# Altium PCB TempGun.PcbDoc
Units mm, origin at the board's own origin, x right, y up, seen from the top; angles counter-clockwise.
Board outline 71 x 30 mm, 3 copper layers (Top Layer, Mid-Layer 6, Bottom Layer); 43 components, 32 nets, 124 pads, 19 vias.
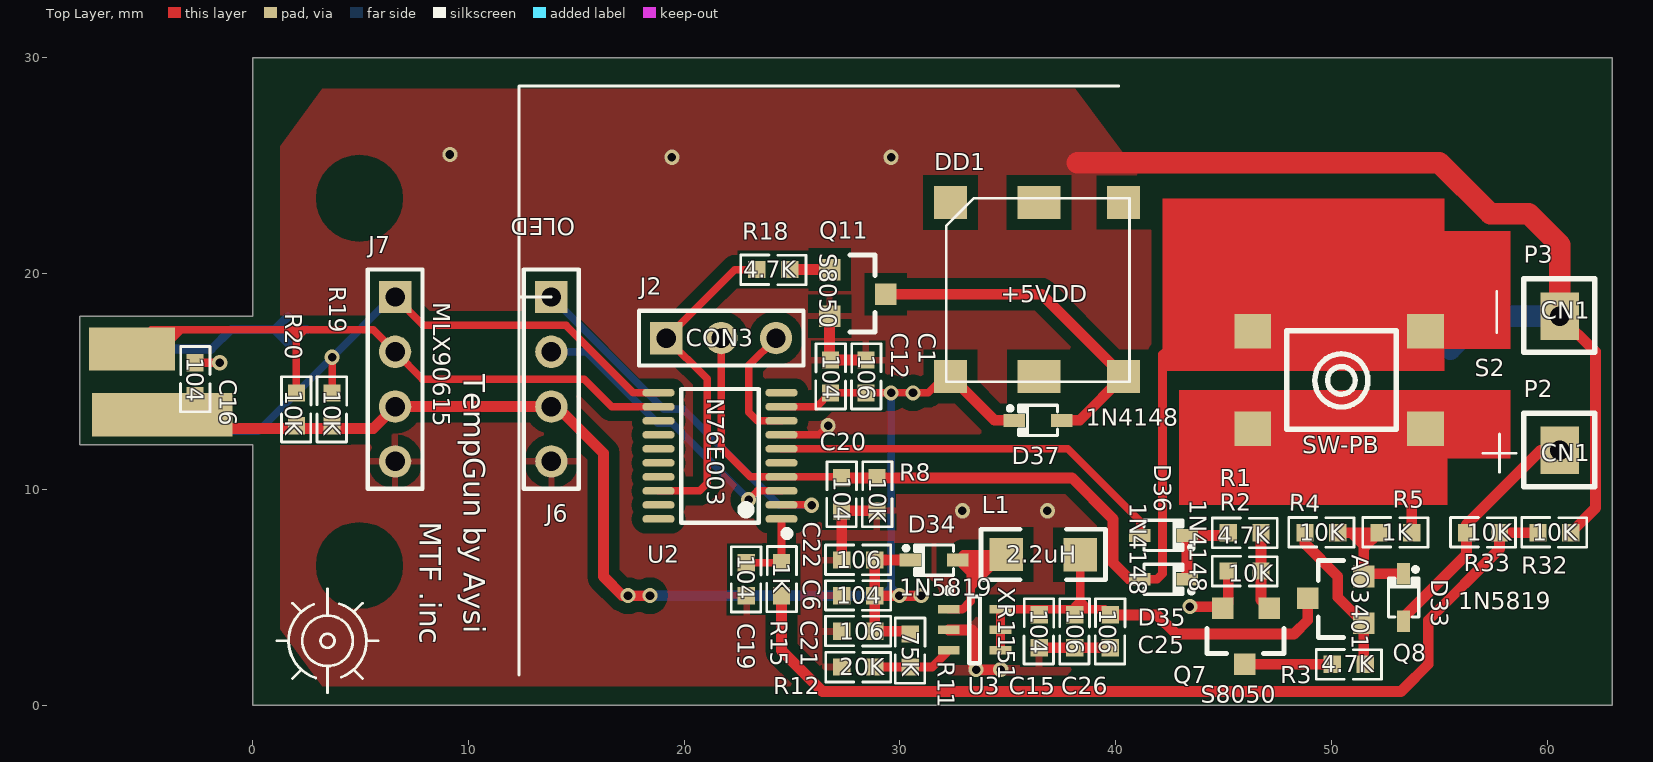
[diagram p0: Top Layer view]
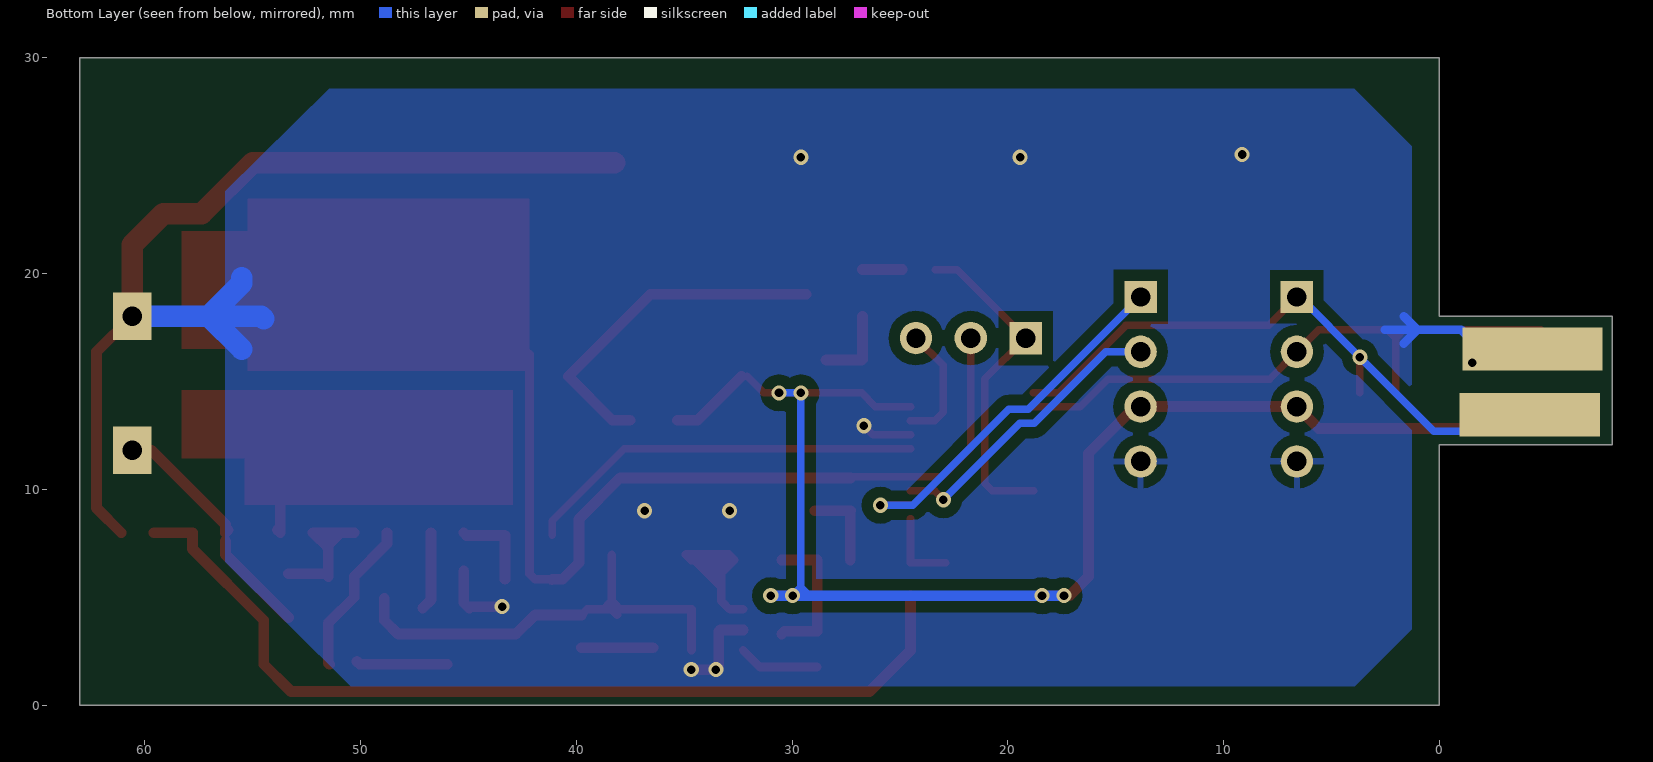
[diagram p1: Bottom Layer view, seen from below]

## Layer stack, top to bottom
Top Layer: signal copper 0.0356
Dielectric: dielectric 0.32, FR-4, Dk 4.8
Mid-Layer 6: signal copper 0.0356
Dielectric: dielectric 0.32, FR-4, Dk 4.8
Bottom Layer: signal copper 0.0356

## Board outline
-8.001,12.065 -8.001,18.034 0,18.034 0,30 63,30 63,0 0,0 0,12.065

## Design rules (kind name [scope] priority, off if disabled: settings)
Clearance Clearance_1 [IsRegion] p1: gap=0.5
Clearance [All] p2: gap=0.3
PolygonConnect PolygonConnect_1 [IsVia] p1: connectstyle=Direct reliefconductorwidth=0.254 reliefentries=4 polygonreliefangle="90 Angle"
PolygonConnect [All] p2: connectstyle=Relief reliefconductorwidth=0.3 reliefentries=4 polygonreliefangle="90 Angle"
RoutingVias [All] p1: holewidth=0.4 width=0.7 viastyle="Through Hole" minholewidth=0.4 minwidth=0.7 maxholewidth=0.711 maxwidth=1.27
SilkToSilkClearance [All] p1: silktosilkclearance=0
SilkscreenOverComponentPads [IsPad] p1: minsilkscreentomaskgap=0
SolderMaskExpansion [All] p1: expansion=0.102
TestPointUsage [All] p1: valid=0 allowmultiple=FALSE
Testpoint [All] p1: side=3 testpointundercomponent=TRUE minsize=1.016 maxsize=2.54 preferedsize=1.524 minholesize=0 maxholesize=1.016 preferedholesize=0.813 testpointgrid=0.025 style=297 order=0-112345678
Width [All] p1: maxlimit=2 minlimit=0.254 preferedwidth=0.3
22 further rules are at their usual default settings.

## Components (designator, comment, footprint, x,y, rotation, side; value= is the part's Value field where it differs from the comment)
C1 "106" 0603 28.429,14.477 r90 top
C6 "104" 0603 28.829,5.08 r180 top
C12 "104" 0603 26.778,14.477 r90 top
C15 "104" 0603 36.449,4.191 r270 top
C16 "104" 0603 -2.667,14.351 r90 top
C19 "104" 0603 22.879,6.603 r270 top
C20 "104" 0603 27.286,9.016 r90 top
C21 "106" 0603 28.829,3.429 r180 top
C22 "106" 0603 28.829,6.731 r180 top
C25 "106" 0603 39.751,4.191 r270 top
C26 "106" 0603 38.1,4.191 r270 top
D33 "1N5819" SOT-323 53.34,6.096 r270 top
D34 "1N5819" SOT-323 30.48,6.731 r0 top
D35 "1N4148" SOT-323 43.307,5.842 r180 top
D36 "1N4148" SOT-323 43.307,7.874 r180 top
D37 "1N4148" SOT-323 35.306,13.208 r0 top
DD1 "+5VDD" 8530 40.64,23.495 r270 top
J2 "CON3" HDR1X3 19.177,17.018 r0 top
J6 "OLED" HDR1X4 13.843,18.923 r270 top locked
J7 "MLX90615" HDR1X4 6.604,18.923 r270 top
L1 "2.2uH" 1206 38.354,6.985 r180 top
P2 "CN1" 1PIN 60.579,11.811 r0 top
P3 "CN1" 1PIN 60.579,18.034 r0 top
Q7 "S8050" SOT-23-3 45.974,1.905 r90 top
Q8 "AO3401" SOT-23-3 48.895,4.953 r0 top
Q11 "S8050" SOT-23-3 29.337,19.05 r180 top
R1 "4.7K" 0603 45.212,8.001 r0 top
R2 "10K" 0603 45.212,6.223 r0 top
R3 "4.7K" 0603 50.038,1.905 r0 top
R4 "10K" 0603 50.292,8.001 r180 top
R5 "1K" 0603 53.721,8.001 r180 top
R8 "10K" 0603 28.937,9.016 r90 top
R11 "75K" 0603 30.48,3.302 r270 top
R12 "20K" 0603 27.305,1.778 r0 top
R15 "1K" 0603 24.511,5.08 r90 top
R18 "4.7K" 0603 23.368,20.193 r0 top
R19 "10K" 0603 3.683,14.478 r270 top
R20 "10K" 0603 2.032,14.478 r270 top
R32 "10K" 0603 61.087,8.001 r180 top
R33 "10K" 0603 57.785,8.001 r180 top
S2 "SW-PB" SW-4-SMD 54.356,12.827 r90 top
U2 "N76E003" TSSOP-20 24.511,8.636 r90 top
U3 "XR1151" SOT-23-6 32.258,4.445 r0 top

## Footprints (in the part's own frame and the unit in brackets; to place one, negate y for a bottom-side part, rotate by r counter-clockwise, add the part's x,y. Pads: shape width x height; smd on the part's side, far side on the other; paste and mask are expansions set on the pad)
1PIN [mm]
  rect 1.8x2.2 hole 0.9: 1(0,0)
  silkscreen extent -1.68,-1.68 1.63,1.72
0603 [mm]
  rect 0.8x0.8 smd: 1(0,0) 2(1.524,0)
  silkscreen extent -0.74,-0.7 2.27,0.68, body extent 0,-0.4 1.53,0.4, height 1
1206 [mm]
  rect 1.55x1.55 smd: 1(0,0) 2(3.43,-0.004)
  silkscreen extent -1.17,-1.17 4.6,1.17, body extent 0,-0.87 3.45,0.87, height 2
8530 [mm]
  rect 1.524x1.524 smd: 0(0.2,-0.275) 0(0.2,-8.3) 1(8.25,-8.3) 2(8.25,-0.275)
  rect 1.524x2 smd: 0(0.2,-4.2) 0(8.25,-4.2)
  silkscreen extent 0,-8.5 8.5,0
HDR1X3 [mm] "Connector; Header; 3 Position"
  rect 1.5x1.5 hole 0.9: 1(0,0)
  round 1.5 hole 0.9: 2(2.54,0) 3(5.08,0)
  silkscreen extent -1.27,-1.27 6.35,1.27
HDR1X4 [mm] "Connector; Header; 4 Position"
  rect 1.5x1.5 hole 0.9: 1(0,0)
  round 1.5 hole 0.9: 2(2.54,0) 3(5.08,0) 4(7.62,0)
  silkscreen extent -1.27,-1.27 8.89,1.27
SOT-23-3 [mm]
  rect 1x1 smd: 1(0,0) 2(2.598,-1.143) 3(2.598,1.016)
  silkscreen extent 0.49,-1.82 1.66,1.75, body extent 0.48,-1.8 2.07,1.75, height 1
SOT-23-6 [mm]
  rect 1x0.4 smd: 1(0,0) 2(0,-0.95) 3(0,-1.9) 4(2.4,-1.9) 5(2.4,-0.95) 6(2.4,0)
  silkscreen extent -0.12,-2.5 1.45,1
SOT-323 [mm]
  rect 1x0.6 smd: 1(2.2,0) 2(0,0)
  silkscreen extent -0.3,-0.7 2,0.7
SW-4-SMD [mm]
  rect 1.6x1.7 smd: 1(0,8) 1(0,0) 2(4.5,8) 2(4.5,0)
  silkscreen extent -0.04,1.35 4.53,6.43
TSSOP-20 [mm]
  oval 0.35x1.5 smd: 1(0,0) 2(0.65,0) 3(1.3,0) 4(1.95,0) 5(2.6,0) 6(3.25,0) 7(3.9,0) 8(4.55,0) 9(5.2,0) 10(5.85,0) 11(5.85,5.7) 12(5.2,5.7) 13(4.55,5.7) 14(3.9,5.7) 15(3.25,5.7) 16(2.6,5.7) 17(1.95,5.7) 18(1.3,5.7) 19(0.65,5.7) 20(0,5.7)
  silkscreen extent -0.82,-0.4 6.02,4.65, body extent -0.38,0.55 6.22,5.15, height 1

## Part data
C1 C12: library part CAP
C6: library part CAP, "Capacitor"
C15 C16 C19 C20 C21 C22 C25 C26: library part CAP_W
D33 D34 D35 D36 D37: library part Diode, "Default Diode"
DD1: library part Pro58.tmp_UnNamed_18
J2: library part "Header 3", "Header, 3-Pin"
J6 J7: library part "Header 4", "Header, 4-Pin"
L1: library part INDUCTOR1_W
Q7 Q11: library part NPN, "NPN Bipolar Transistor"
Q8: library part MOSFET-P, "P-Channel MOSFET"
R1 R2 R3 R4 R5 R8 R11 R12 R15 R18 R19 R20 R32 R33: library part Res2, "Resistor"
S2: "Switch"

## Free pads (board coordinates)
  rect 6.5x2 smd: 0(-4.191,13.462)
  rect 4x2 smd: 1(-5.588,16.51)
  rect 6.5x2 smd far side: 2(-4.318,16.51) 3(-4.191,13.462)

## Via types
v1: diameter 0.7, hole 0.4, Top Layer to Bottom Layer, tented both sides, 19 vias

## Nets (pads, with @x,y where several pads share a name; then routed paths per layer and width w, separated by ;. In a path a pad name is that pad's centre, name@x,y a point inside that pad or via, vN(x,y) a via of type N, cw(c..) or ccw(c..) an arc to the next point about the centre after c; other vN are vias at no path point)
+3.3V: C1.1 C6.1 C12.1 C16.1 C21.1 C22.1 D34.2 D37.2 DD1.1 J6.3 J7.3 pad.0 R11.1 R19.2 R20.2 U2.9 | length 74.9
  Top Layer w0.35: U2.9 26.137,13.836 C12.1 C1.1 v1(29.591,14.478) v1(30.607,14.478) 31.319,14.478 DD1.1@32.086,15.245
  Top Layer w0.5: pad.0@-1.016,12.827 1.143,12.827 5.588,12.827 J7.3 J6.3 14.097,13.843 16.256,11.684 16.256,5.969 17.145,5.08 v1(18.415,5.08) v1(17.399,5.08) ; C6.1 v1(29.972,5.08) v1(30.988,5.08) ; R11.1 30.353,3.429 C21.1 C22.1 D34.2 ; DD1.1 34.377,13.208 D37.2
  Bottom Layer w0.35: 29.21,5.08 29.591,5.461 ; 29.591,5.08 29.591,5.588 ; v1(29.972,5.08) 29.591,5.461 ; v1(30.607,14.478) v1(29.591,14.478) 29.591,5.588 ; 29.591,5.461 29.591,5.588
  Bottom Layer w0.5: v1(18.415,5.08) v1(17.399,5.08) 27.432,5.08 v1(29.972,5.08) v1(30.988,5.08)
A: U2.20
B: U2.19
BAT+: D33.1 P2.1 R33.2 | length 11.4
  Top Layer w0.5: D33.1@53.34,4.064 56.261,6.985 R33.2@56.261,7.62 ; R33.2@56.134,8.128 R33.2 56.261,8.382 59.69,11.811 P2.1@60.96,11.811
C: U2.17
D: U2.16
DIG1: J6.1 U2.2 | length 17.5
  Top Layer w0.35: U2.2 25.893,9.286 v1(25.908,9.271)
  Bottom Layer w0.35: J6.1 19.05,13.716 19.963,13.716 24.408,9.271 v1(25.908,9.271)
DIG2: J6.2 U2.3 | length 13.7
  Top Layer w0.35: v1(22.987,9.525) 23.398,9.936 U2.3
  Bottom Layer w0.35: J6.2 15.464,16.383 18.781,13.066 19.446,13.066 v1(22.987,9.525)
DIG3: U2.5
DIG4: J2.3 U2.8 | length 5.6
  Top Layer w0.35: J2.3 22.987,15.748 22.987,13.589 23.39,13.186 U2.8
E: U2.15
G: U2.13
GND: C1.2 C6.2 C12.2 C15.2 C16.2 C19.2 C20.1 C21.2 C22.2 C25.2 C26.2 J6.4 J7.4 P3.1 pad.2 Q7.3 Q11.3 R2.1 R8.1 R12.1 R32.1 U2.7 U3.2 | length 80.2
  Top Layer w0.35: U2.7 26.252,12.536 v1(26.67,12.954) ; C12.2@26.739,16.041 C12.2
  Top Layer w0.4: C16.2 v1(-1.524,15.875)
  Top Layer w0.5: C12.2@26.739,16.041 Q11.3 ; C12.2 C1.2 ; C22.2 27.305,8.998 C20.1 R8.1 ; U3.2 33.335,3.495 33.401,3.429 33.401,1.778 v1(33.528,1.651) v1(34.671,1.651) ; C15.2 C25.2 ; v1(43.434,4.572) 44.889,4.572 Q7.3 45.212,4.757 R2.1 ; P3.1 62.23,16.383 62.23,9.144 R32.1
  Top Layer w1: 38.227,25.146 54.991,25.146 57.366,22.771 59.144,22.771 59.182,22.733 60.579,21.336 P3.1
  Bottom Layer w0.4: pad.2@-4.445,16.51 -1.905,16.51 -1.016,17.399 1.016,17.399 ; 1.651,16.764 1.016,17.399 ; 1.651,18.034 1.016,17.399 ; 2.54,17.399 1.016,17.399
  Bottom Layer w1: 54.483,17.907 54.61,18.034 57.023,18.034 ; 55.499,16.51 57.023,18.034 ; 55.499,19.812 55.499,19.558 57.023,18.034 ; P3.1 57.023,18.034
  other v1: 32.893,9.017 36.83,9.017 19.431,25.4 29.591,25.4 9.144,25.527
H: U2.10
ICPCK: J2.1 R18.1 U2.18 | length 15.5
  Top Layer w0.35: U2.18 20.574,9.936 ; 20.656,9.936 20.574,9.936 ; R18.1 22.352,20.193 J2.1 21.067,15.128 21.067,10.287 20.716,9.936 20.574,9.936
NetC19_1: C19.1 R15.2 U2.1 | length 3.7
  Top Layer w0.35: C19.1 R15.2 U2.1
NetD33_2: D33.2 Q8.3 R4.1 R5.2 | length 7.8
  Top Layer w0.5: R4.1 51.562,8.001 ; 50.927,8.001 51.493,7.435 51.493,7.297 ; D33.2 51.62,6.096 Q8.3 51.493,7.297 ; 51.493,7.297 R5.2 51.562,8.001 ; 51.493,7.297 51.562,7.366 51.562,8.001
NetD34_1: D34.1 L1.2 U3.1 | length 12.9
  Top Layer w0.4: U3.1 32.893,4.445 33.274,4.826 33.274,5.461 ; 33.274,5.756 33.274,5.715 ; 33.655,6.137 33.274,6.137 ; D34.1 L1.2@34.666,6.731 ; D34.1 33.041,6.371 ; D34.1 32.938,6.989 L1.2 ; 33.041,6.371 33.274,6.137 ; 33.041,6.371 33.803,6.371 34.163,6.731 L1.2@34.666,6.731 ; 33.274,5.461 33.274,5.715 ; 33.274,5.461 34.802,6.989 L1.2 ; 33.274,5.715 33.274,6.137 ; L1.2@34.666,6.731 L1.2 ; L1.2@34.666,6.731 L1.2
NetD35_2: D35.2 D36.2 R1.1 | length 4
  Top Layer w0.5: D35.2 D36.2 45.085,7.874 R1.1
NetD37_1: D37.1 DD1.2 Q11.1 | length 16.3
  Top Layer w0.5: Q11.1 36.56,19.05 DD1.2 38.328,13.208 D37.1
NetQ7_1: Q7.1 R3.1 | length 4.2
  Top Layer w0.5: Q7.1 R3.1 R3.1@50.165,2.032
NetQ7_2: Q7.2 R1.2 R2.2 | length 3.7
  Top Layer w0.5: R1.2 R2.2 46.736,4.884 Q7.2
NetQ8_2: Q8.2 R3.2 R4.2 | length 7.2
  Top Layer w0.5: R4.2 48.768,7.493 50.292,5.969 50.292,5.011 Q8.2 51.493,1.963 R3.2@51.435,1.905
NetQ11_2: Q11.2 R18.2 | length 1.8
  Top Layer w0.5: R18.2 Q11.2
NetR5_1: R5.1 S2.1 | length 13.3
  Top Layer w0.5: S2.1@46.356,12.827 54.356,12.827 53.721,12.192 R5.1 R5.1@53.848,8.128
NetR11_2: R11.2 R12.2 U3.3 | length 3.7
  Top Layer w0.4: R12.2 31.491,1.778 U3.3
NetR15_1: R15.1 R32.2 R33.1 | length 43.1
  Top Layer w0.5: R15.1 24.511,2.54 26.416,0.635 53.213,0.635 53.34,0.762 54.483,1.905 54.483,3.937 57.785,7.239 R33.1 R32.2
P1.7: D36.1 U2.6 | length 18.7
  Top Layer w0.35: U2.6 37.771,11.886 41.107,8.55 D36.1
"POWER KEY": C20.2 D35.1 J2.2 R8.2 S2.2 U2.4 | length 52.2
  Top Layer w0.35: J2.2 21.717,11.938 23.069,10.586 U2.4 27.24,10.586 C20.2
  Top Layer w0.4: D35.1 41.91,5.842 42.164,6.096 42.164,16.256 43.235,17.327
  Top Layer w0.5: C20.2 R8.2 35.688,10.54 37.212,10.54 37.974,10.54 39.878,8.636 39.878,6.604 40.64,5.842 D35.1 D35.1@41.129,5.82 ; 43.235,17.327 S2.2@54.356,17.327
SCL: J7.2 pad.1 R20.1 U2.12 | length 33.4
  Top Layer w0.35: 1.397,17.399 1.651,17.399 2.032,17.018 ; R20.1 2.032,16.764 ; 2.032,17.399 2.032,17.018 ; 2.413,17.399 2.032,17.018 ; U2.12 16.644,13.836 15.367,15.113 7.874,15.113 J7.2 5.588,17.399 -3.302,17.399 ; -3.302,17.399 -4.699,17.399 pad.1 -4.191,16.51 -3.302,17.399 ; 2.032,16.764 2.032,17.018 ; 2.032,16.764 2.032,17.018
SDA: J7.1 pad.3 R19.1 U2.11 | length 29.8
  Top Layer w0.35: R19.1 v1(3.683,16.129) ; J7.1 7.919,17.608 14.523,17.608 17.645,14.486 U2.11
  Bottom Layer w0.35: pad.3 -1.905,13.462 -1.143,12.7 0.254,12.7 ; 0.127,12.7 0.254,12.7 ; J7.1@6.604,18.669 J7.1 6.477,18.923 v1(3.683,16.129) 0.254,12.7
VCC: C15.1 C25.1 C26.1 L1.1 Q8.1 U3.4 U3.5 U3.6 | length 22.3
  Top Layer w0.4: U3.4 U3.6 39.497,4.445 C25.1 ; L1.1 38.354,4.826 ; 38.989,4.445 38.735,4.445 38.354,4.826 ; 38.354,4.826 38.354,4.445 C26.1 38.1,4.572 38.354,4.826
  Top Layer w0.5: C25.1 41.91,4.191 42.799,3.302 48.26,3.302 48.895,3.937 Q8.1
pads on no net: DD1.0 U2.14

## Polygon pours and split planes (outlines as drawn)
GND on Top Layer "Bottom Layer-No Net" (solid, remove dead copper, pour order 1000): 1.27,25.908 3.229,28.575 38.128,28.575 41.656,23.815 41.656,6.652 37.385,0.889 3.22,0.889 1.27,3.52
GND on Bottom Layer "Bottom Layer-No Net" (solid, remove dead copper, pour order 1001): 1.27,25.908 3.937,28.575 51.457,28.575 56.261,23.815 56.261,6.652 50.446,0.889 3.925,0.889 1.27,3.52

## Other copper
Top Layer:
  rectangle net "POWER KEY": 42.164,15.494 55.245,23.495
  rectangle net "POWER KEY": 55.118,16.51 58.293,21.971
  rectangle net NetR5_1: 42.926,9.271 55.372,14.605
  rectangle net NetR5_1: 55.118,11.43 58.293,14.605
  pour cut-out: 4.953,4.477 cw(c4.953,6.477) 2.953,6.477 cw(c4.953,6.477) 4.953,8.477 cw(c4.953,6.477) 6.953,6.477 cw(c4.953,6.477)
  pour cut-out: 4.953,21.495 cw(c4.953,23.495) 2.953,23.495 cw(c4.953,23.495) 4.953,25.495 cw(c4.953,23.495) 6.953,23.495 cw(c4.953,23.495)

## Silkscreen, mask and mechanical layers (free items; w line width, h text height)
Top Overlay:
  circle w0.127: c3.471,2.989 r1.171
  circle w0.127: c3.471,2.989 r0.324
  lines w0.127: 1.122,2.989 1.63,2.989 ; 1.852,1.243 2.265,1.656 ; 1.852,4.735 2.265,4.323 ; 2.837,4.679 ccw(c3.471,2.989) 2.921,1.27 ; 3.471,0.576 3.471,1.818 ; 3.471,4.16 3.471,5.402 ; 4.021,4.708 cw(c3.471,2.989) 4.105,1.299 ; 4.678,1.656 5.09,1.243 ; 4.678,4.323 5.09,4.735 ; 5.313,2.989 5.821,2.989 ; 12.343,1.402 12.343,28.702 40.143,28.702 ; 12.343,18.923 13.843,18.923 ; 57.023,11.684 58.547,11.684 ; 57.658,17.272 57.658,19.177 ; 57.785,10.795 57.785,12.573
  text "TempGun by Aysi" at 9.779,15.346 h1 r270
  text "MTF .inc" at 7.747,8.509 h1 r270
Mechanical 1:
  circle w0.127: c5,6.5 r1.25
  circle w0.127: c58.005,26.5 r2
  circle w0.127: c58.005,3.5 r2
  circle w0.127: c60.5,26.5 r1.25
  circle w0.127: c60.5,3.5 r1.25
  circle w0.127: c5,23.5 r1.25
  circle w0.127: c0,15.24 r0.35
  circle w0.127: c0,16.51 r0.35
  circle w0.127: c0,13.97 r0.35
  lines w0.127: -8.001,12.065 -8.001,18.034 -3.048,18.034 0,18.034 0,30 63,30 63,0 0,0 0,12.065 -3.048,12.065 -8.001,12.065
Mechanical 13:
  circle w0.127: c50.5,15 r1.461
  lines w0.127: 36.25,15 44.25,15 50.5,15 60.5,15 ; 5,6.5 5,23.5 60.5,23.5 60.5,6.5 5,6.5 ; 16.25,4 16.25,26 36.25,26 36.25,4 16.25,4